# Altium PCB PCB3.PcbDoc
Units mil, origin at the board's own origin, x right, y up, seen from the top; angles counter-clockwise.
Board outline 6000 x 4000 mil, 2 copper layers (Top Layer, Bottom Layer); 15 components, 16 nets, 71 pads, 8 vias.
Unrouted connection lines stored in the file: 1.
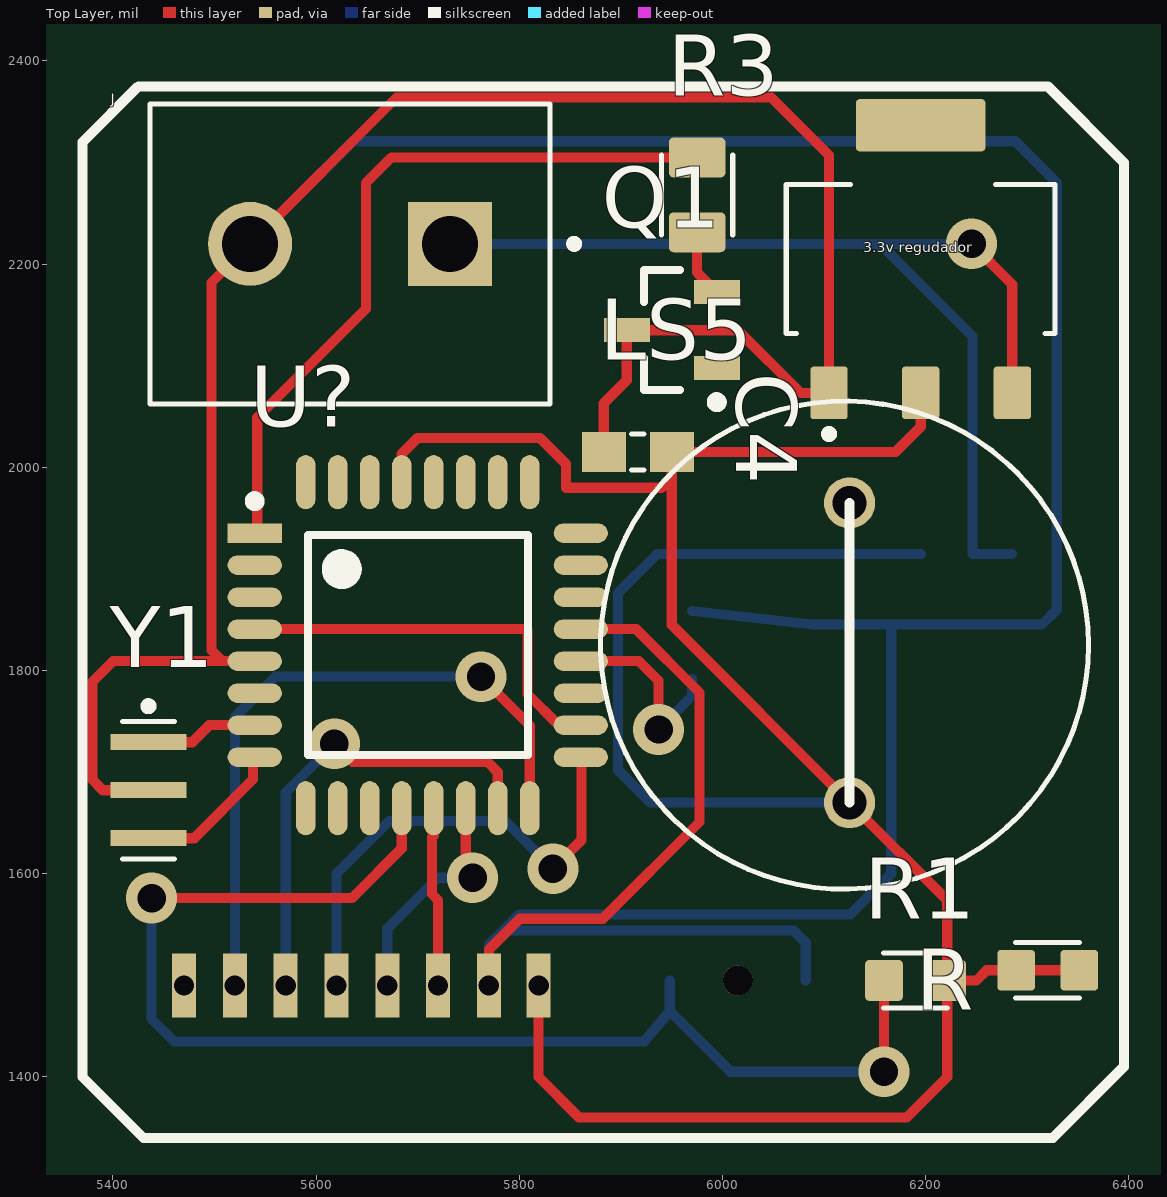
[diagram p0: Top Layer view]
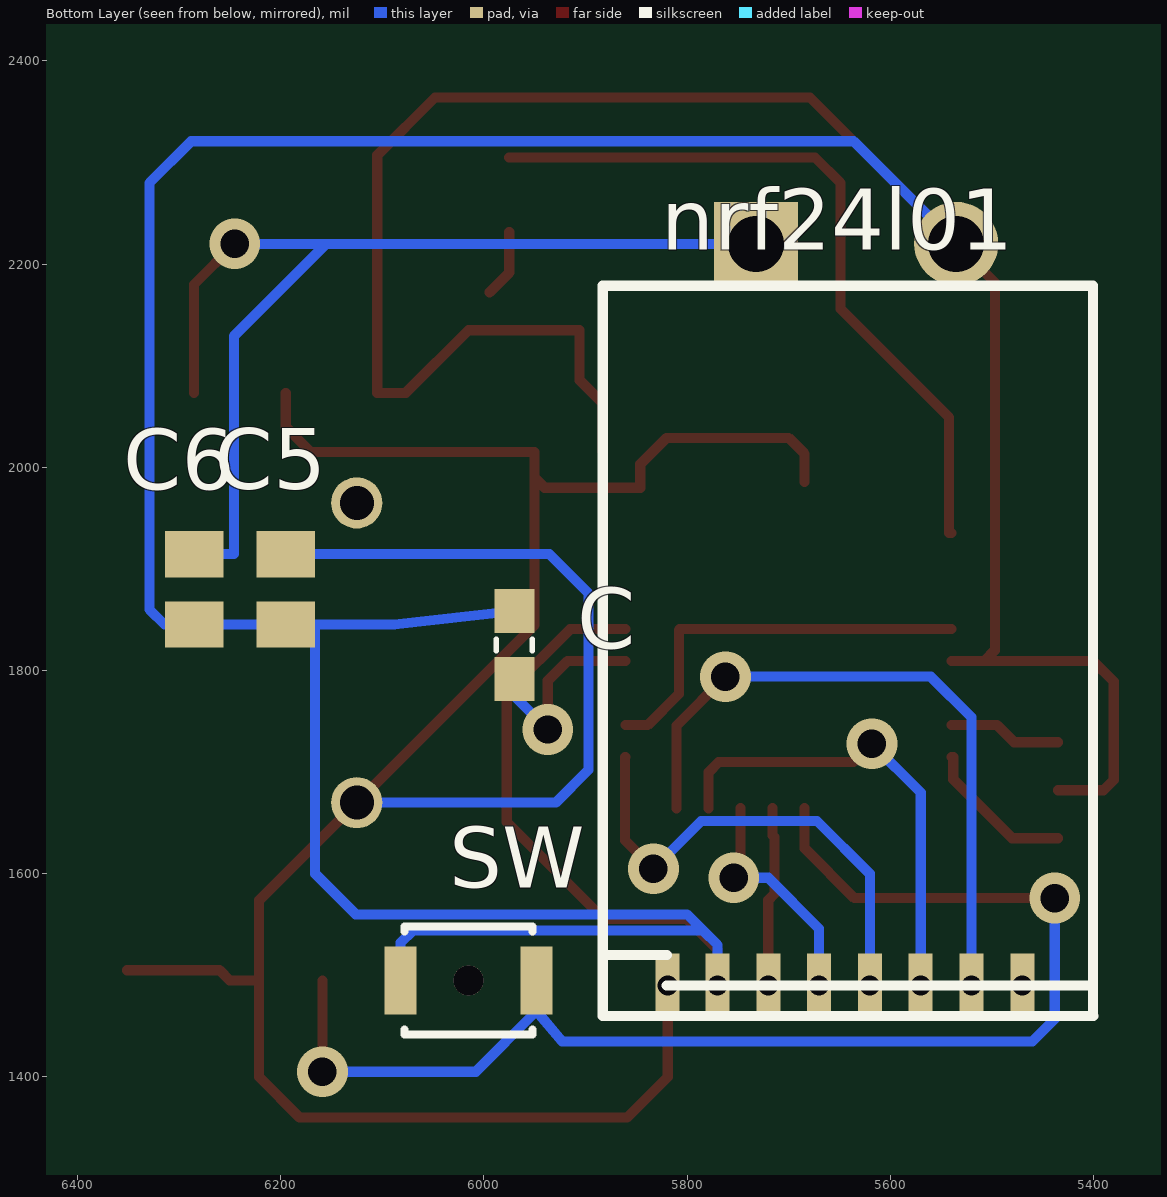
[diagram p1: Bottom Layer view, seen from below]
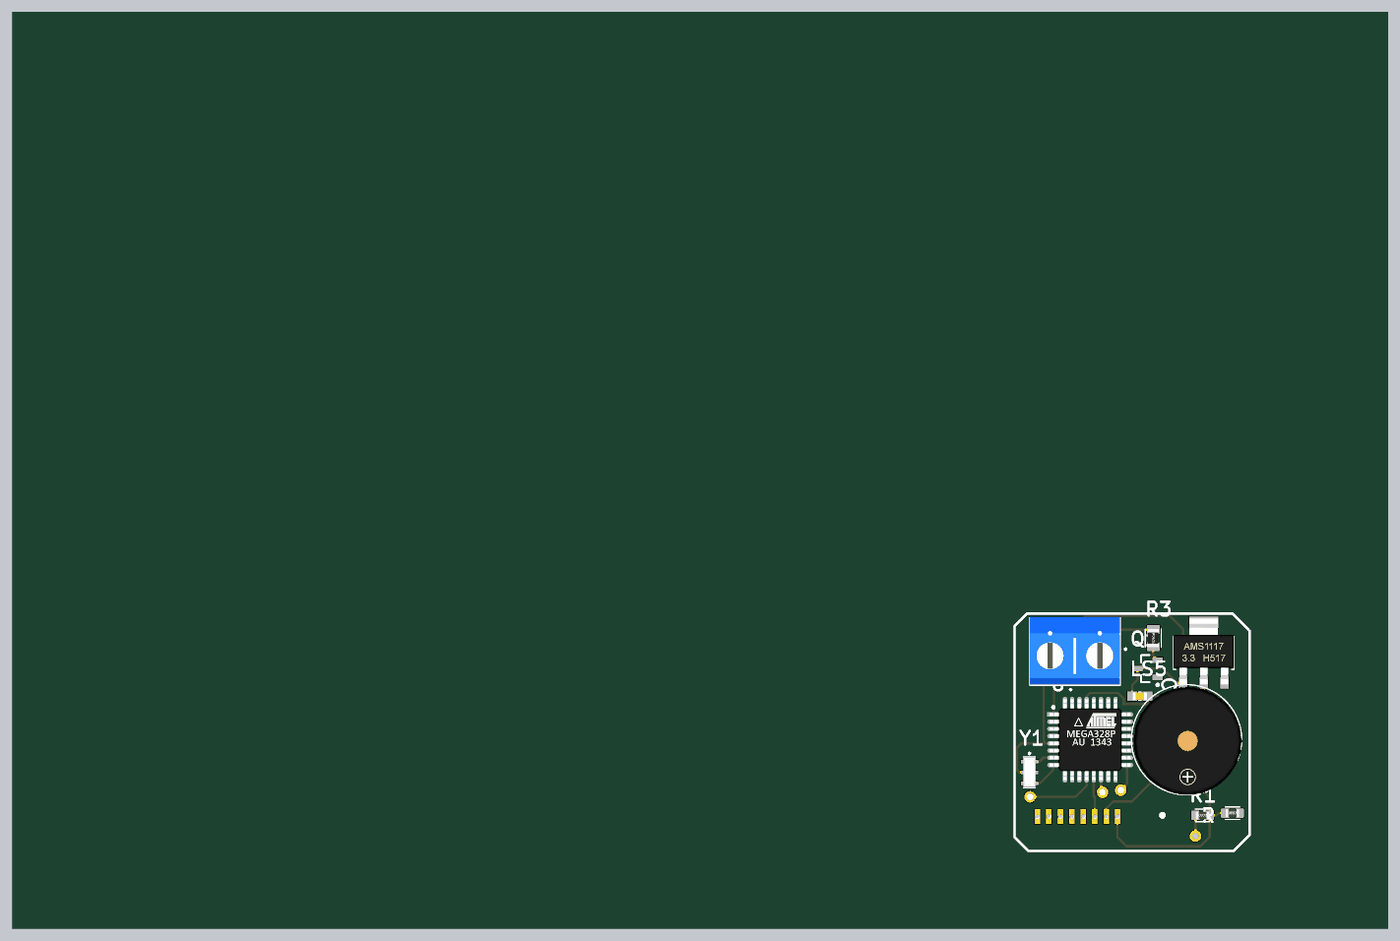
[diagram p2: 3D render of the assembled board from above, using the file's embedded part models]
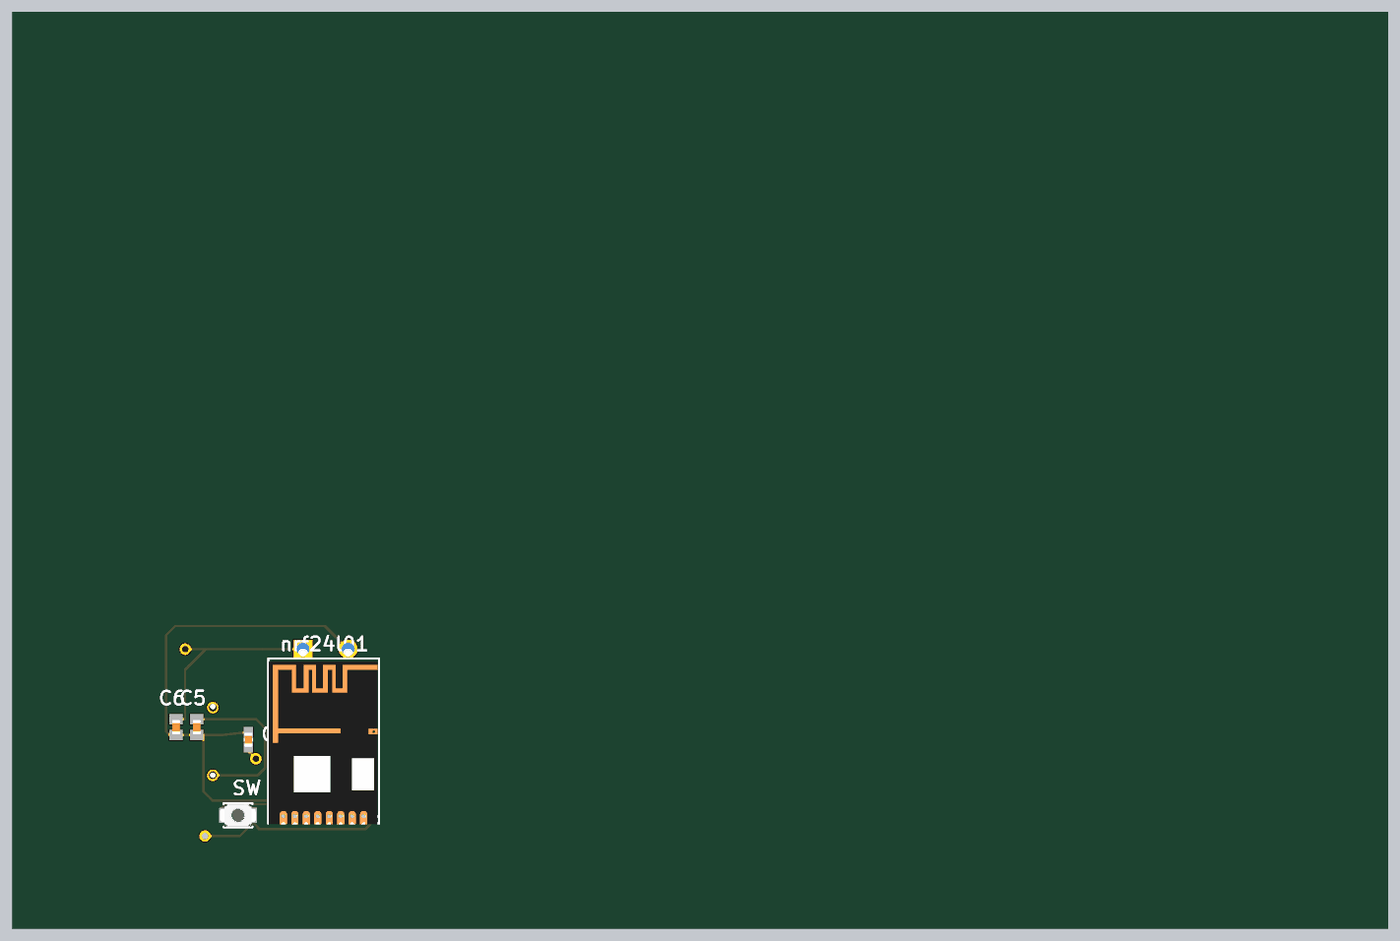
[diagram p3: 3D render of the assembled board from below, using the file's embedded part models]

## Layer stack, top to bottom
Top Solder: solder mask 0.4, Solder Resist, Dk 3.5
Top Layer: signal copper 1.4
Dielectric 1: dielectric 12.6, FR-4, Dk 4.8
Bottom Layer: signal copper 1.4
Bottom Solder: solder mask 0.4, Solder Resist, Dk 3.5

## Board outline
1000,1000 7000,1000 7000,5000 1000,5000

## Design rules (kind name [scope] priority, off if disabled: settings)
Clearance [All] p1: gap=10 ignorepadtopadclearanceinfootprint=FALSE except(0: Arc-Hole Track-Hole SMDPad-Hole THPad-Hole Via-Hole Fill-Hole Poly-Hole Region-Hole Text-Hole)
PolygonConnect [All] p1: connectstyle=Relief reliefconductorwidth=10 reliefentries=4 polygonreliefangle="90 Angle" airgapwidth=10
RoutingVias [All] p1: holewidth=28 width=50 viastyle="Through Hole" minholewidth=28 minwidth=50 maxholewidth=28 maxwidth=50
SolderMaskExpansion [All] p1: expansion=4 istentingtop=FALSE
Width [All] p1: maxlimit=10 minlimit=10 preferedwidth=10
30 further rules are at their usual default settings.

## Components (designator, comment, footprint, x,y, rotation, side; value= is the part's Value field where it differs from the comment)
"3.3v regudador" "AMS1117-3.3" SOT229P700X180-4N 6195,2205 r0 top
C "CC0603KRX7R9BB104" CAPC1608X90 5970,1825 r90 bottom
C4 "CC0603KRX7R9BB104" CAPC1608X90 5916.54,2015 r180 top
C5 "0805YC103J4T2A" CAPC2012X94N 6195,1880 r90 bottom
C6 "0805YC103J4T2A" CAPC2012X94N 6285,1880 r90 bottom
J "KF301-2P" HANDSON_KF301-2P 5633.43,2220 r180 top
LS5 "PS1240P02BT" XDCR_PS1240P02BT 6120,1825 r90 top
nrf24l01 "SMD" NRF24L01 5820,1460 r90 bottom
Q1 "QNPN" SOT-23B_N 5950,2135 r180 top
R "RP73D1J13RBTDG" RESC1608X50N 6320,1505 r0 top
R1 "RP73D1J13RBTDG" RESC1608X50N 6190,1495 r0 top
R3 "2-2176053-0" RESC2012X65N 5975,2268.19 r270 top
SW "B3U-1000P-B" Omron_0_MFG 6015,1495 r180 bottom
U? "ATMEGA328PB-AUR" Microchip_C04-074_IPC_C 5700,1825 r0 top
Y1 "clock" OSC_CSTCE8M00G52-R0 5435,1682.24 r270 top

## Footprints (in the part's own frame and the unit in brackets; to place one, negate y for a bottom-side part, rotate by r counter-clockwise, add the part's x,y. Pads: shape width x height; smd on the part's side, far side on the other; paste and mask are expansions set on the pad)
CAPC1608X90 [mm]
  rect 1.1x1 smd: 1(-0.85,0) 2(0.85,0)
  silkscreen extent -0.15,-0.45 0.15,0.45, body extent -0.8,-0.45 0.8,0.45, height 0.79
CAPC2012X94N [mm]
  rect 1.16x1.47 smd: 1(-0.88,0) 2(0.88,0)
  body extent -0.8,-0.45 0.8,0.45, height 0.79
HANDSON_KF301-2P [mm]
  rect 2.1x2.1 hole 1.4: 1(-2.5,0)
  round 2.1 hole 1.4: 2(2.5,0)
  silkscreen extent -5.7,-3.5 5,4, body extent -5,-3.56 5,3.94, height 10
Microchip_C04-074_IPC_C [mm]
  rect 1.355x0.486 smd paste+0 mask+0: 1(-4.075,2.8)
  rrect100% 1.355x0.486 smd paste+0 mask+0: 2(-4.075,2) 3(-4.075,1.2) 4(-4.075,0.4) 5(-4.075,-0.4) 6(-4.075,-1.2) 7(-4.075,-2) 8(-4.075,-2.8) 17(4.075,-2.8) 18(4.075,-2) 19(4.075,-1.2) 20(4.075,-0.4) 21(4.075,0.4) 22(4.075,1.2) 23(4.075,2) 24(4.075,2.8)
  rrect100% 0.486x1.355 smd paste+0 mask+0: 9(-2.8,-4.075) 10(-2,-4.075) 11(-1.2,-4.075) 12(-0.4,-4.075) 13(0.4,-4.075) 14(1.2,-4.075) 15(2,-4.075) 16(2.8,-4.075) 25(2.8,4.075) 26(2,4.075) 27(1.2,4.075) 28(0.4,4.075) 29(-0.4,4.075) 30(-1.2,4.075) 31(-2,4.075) 32(-2.8,4.075)
  silkscreen extent -4.2,-2.75 2.75,3.72, body extent -4.5,-4.5 4.5,4.5, height 1
NRF24L01 [mil] "smd"
  rect 62.99x23.62 hole 20: 1(30,-1) 2(30,-49.99) 3(30,-100) 4(30,-150) 5(30,-200) 6(30,-250) 7(30,-300) 8(30,-350)
  silkscreen extent 0,-420 719,63, body extent -3,-412 706,60, height 32
Omron_0_MFG [mm]
  rect 0.8x1.7 smd paste+0 mask+0: 1(-1.7,0) 2(1.7,0)
  round 0.75 hole 0.75 unplated paste-1000 mask+0: ""(0,0)
  silkscreen extent -1.6,-1.35 1.6,1.35, body extent -2,-1.25 2,1.25, height 1.75
OSC_CSTCE8M00G52-R0 [mm]
  rect 0.4x1.9 smd: 1(-1.2,0) 2(0,0) 3(1.2,0)
  silkscreen extent -2.2,-0.65 1.72,0.65, body extent -1.6,-0.65 1.6,0.65, height 0.8
RESC1608X50N [mm]
  rrect20% 0.94x1.02 smd: 1(-0.79,0) 2(0.79,0)
  silkscreen extent -0.8,-0.69 0.8,0.69, body extent -0.78,-0.43 0.78,0.43, height 0.49
RESC2012X65N [mm]
  rrect25% 1x1.42 smd: 1(-0.935,0) 2(0.935,0)
  silkscreen extent -1,-0.89 1,0.89, body extent -1,-0.62 1,0.62, height 0.6
SOT229P700X180-4N [mm]
  rrect15% 0.93x1.31 smd: 1(-2.29,-3.345) 2(0,-3.345) 3(2.29,-3.345)
  rrect15% 3.24x1.31 smd: 4(0,3.345)
  silkscreen extent -3.36,-4.47 3.36,1.86, body extent -3.35,-3.52 3.35,3.78, height 1.91
SOT-23B_N [mm] "SOT23, 3-Leads, Body 2.9x1.3mm, Pitch 0.95mm, Lead Span 2.4mm, IPC Medium Density"
  rect 1.15x0.6 smd: 1(-1.125,0.95) 2(-1.125,-0.95) 3(1.125,0)
  silkscreen extent -1.25,-1.5 0.7,1.92, body extent -0.7,-1.5 0.7,1.5, height 1.14
XDCR_PS1240P02BT [mm]
  round 1.28 hole 0.85: 1(-3.937,-0.127) 2(3.556,-0.127)
  silkscreen extent -6.1,-6.1 6.1,6.1, body extent -6.13,-6.13 5.87,5.87, height 9.6

## Part data
"3.3v regudador": "Sot223/Pkg 1-Amp 3.3-Volt Low Drop Out Voltage Regulatator", Package=None, Availability=Unavailable, MF="Advanced Monolithic Systems", MP=AMS1117-3.3, Price=None, SnapEDA_Link=https://www.snapeda.com/parts/AMS1117-3.3/Advanced%20Monolithic%20Systems/view-part/53450/?ref=snap
C C4: "0.1ÂµF Â±10% 50V Ceramic Capacitor X7R 0603 _1608 Metric_", Package="0603 Yageo", Digi-Key_Part_Number=311-1344-1-ND, Digi-Key_Purchase_URL=https://www.digikey.com/product-detail/en/yageo/CC0603KRX7R9BB104/311-1344-1-ND/2103128?utm_source=snapeda&utm_medium=aggregator&utm_campaign=symbol, MF=Yageo, MP=CC0603KRX7R9BB104, SnapEDA_Link=https://www.snapeda.com/parts/CC0603KRX7R9BB104/Yageo/view-part/78680/?ref=snap
C5 C6: "10000pF Â±5% 16V Ceramic Capacitor X7R 0805 _2012 Metric_", Package="2012 AVX", Availability=Unavailable, MF=AVX, MP=0805YC103J4T2A, Price=None, SnapEDA_Link=https://www.snapeda.com/parts/0805YC103J4T2A/AVX/view-part/606803/?ref=snap
J: "2 Pin Terminal Block 5mm Pitch", Package=Package, Availability=Unavailable, MF="Handson Technology", MP=KF301-2P, Price=None, SnapEDA_Link=https://www.snapeda.com/parts/KF301-2P/Handson%20Technology/view-part/4276957/?ref=snap
LS5: "Buzzers Transducer, Externally Driven Piezo 3V 4kHz 60dB @ 3V, 10cm Through Hole PC Pins", Package="2020 TDK", Availability=Unavailable, MF=TDK, MP=PS1240P02BT, Price=None, SnapEDA_Link=https://www.snapeda.com/parts/PS1240P02BT/TDK/view-part/53420/?ref=snap
nrf24l01: library part nrf24l01_smd, Supplier Part Number 1=311-0.0ERCT-ND, Supplier 1=Digi-Key
Q1: "NPN Bipolar Transistor", LatestRevisionDate=29-May-2009, LatestRevisionNote="IPC-7351 Footprint Added.", PackageDescription="3-Pin SOT-23 Package 0.95 mm Pitch, 2.4 mm Lead Span", PackageReference=SOT-23B, PackageVersion=Aug-1999, Published=8-Jun-2000, Publisher="Altium Limited"
R R1: "Res, Thin Film, 13r, 0.1%, 0.1w, 0603", Package="0603 TE Connectivity / AMP", Availability=Unavailable, MF="TE Connectivity", MP=RP73D1J13RBTDG, Price=None, SnapEDA_Link=https://www.snapeda.com/parts/RP73D1J13RBTDG/TE%20Connectivity/view-part/970906/?ref=snap, TE_purchase_URL=https://www.te.com/usa-en/product-RP73D1J13RBTDG.html?te_bu=Cor&te_type=disp&te_campaign=seda_glo_cor-seda-global-disp-prtnr-fy19-seda-model-bom-cta_sma-317_1&elqCampaignId=32493
R3: "RES 0.33 OHM 1% 1/4W 0805", Package=0805, Power_Rating=".25 W", Resistance=.33, Tolerance=1%, Availability=Unavailable, EU_RoHS_Compliance="Compliant with Exemptions", MF="TE Connectivity", MP=2-2176053-0, Price=None, SnapEDA_Link=https://www.snapeda.com/parts/2-2176053-0/TE%20Connectivity/view-part/2214508/?ref=snap
Y1: library part CSTCE8M00G52-R0, "8MHz Ceramic Resonator Built in Capacitor 10pF Â±0.2% -20Â°C ~ 80Â°C Surface Mount", Package="Surface Mount Murata Electronics North America", Availability=Bad, Check_prices=https://www.snapeda.com/parts/CSTCE8M00G52-R0/Murata%20Electronics%20North%20America/view-part/234504/?ref=eda, MF=Murata, MP=CSTCE8M00G52-R0, Price=None, SnapEDA_Link=https://www.snapeda.com/parts/CSTCE8M00G52-R0/Murata%20Electronics%20North%20America/view-part/234504/?ref=snap

## Via types
v1: diameter 50, hole 28, Top Layer to Bottom Layer, 8 vias

## Nets (pads, with @x,y where several pads share a name; then routed paths per layer and width w, separated by ;. In a path a pad name is that pad's centre, name@x,y a point inside that pad or via, vN(x,y) a via of type N, cw(c..) or ccw(c..) an arc to the next point about the centre after c; other vN are vias at no path point)
3v3: "3.3v regudador.2" C4.1 C5.2 LS5.1 nrf24l01.1 R1.2 R.1 R.2 U?.29 | length 2742.5
  Top Layer w10: U?.29 5684.25,2013.25 5700,2029 5820,2029 5846,2003 5846,1980 5940,1980 5950,1990 ; nrf24l01.1 5819,1400 5859,1360 6181.1,1360 6221.1,1400 R1.2 ; 6195,2073.31 6195,2040 6170,2015 C4.1 5950,1990 ; R.2 R.1 6260,1505 6250,1495 R1.2 ; 5950,1990 5950,1845 LS5.1 6221.1,1573.9 R1.2
  Bottom Layer w10: LS5.1 5929.22,1670 5897,1702.22 5897,1876 5935.65,1914.65 C5.2
GND: "3.3v regudador.1" C4.2 C5.1 C6.1 C.2 J.2 nrf24l01.2 Q1.3 SW.1 U?.5 U?.21 Y1.2 | length 5249.6
  Top Layer w10: Y1.2 5390,1682.24 5380,1692.24 5380,1789.25 5400,1809.25 5507.75,1809.25 ; U?.5 5507.75,1809.25 ; nrf24l01.2 5770.01,1525.29 5800.4,1555.68 5882.11,1555.68 5977.34,1650.92 5977.34,1778.41 5915,1840.75 U?.21 ; C4.2 5883.07,2063 5905.71,2085.64 Q1.3 6015,2135 6076.69,2073.31 6104.84,2073.31 6104.84,2307.16 6048,2364 5679,2364 J.2 5497,2182 5497,1820 5507.75,1809.25
  Bottom Layer w10: J.2 5636,2321 6288,2321 6329,2280 6329,1860 6314.35,1845.35 C6.1 C5.1 6166,1845.35 ; nrf24l01.2 5770.01,1530 5784.01,1544 ; C.2 6088.11,1845.35 6166,1845.35 ; SW.1 6081.93,1532.07 6070,1544 5784.01,1544 ; 5784.01,1544 5800.01,1560 6126,1560 6166,1600 6166,1845.35
"Net3.3v regudador_3": "3.3v regudador.3" C6.2 J.1 | length 1058.6
  Top Layer w10: v1(6245.16,2220) 6285.16,2180 6285.16,2073.31
  Bottom Layer w10: J.1 6155,2220 ; v1(6245.16,2220) 6155,2220 ; C6.2 6246,1914.65 6246,2129 6155,2220
NetC_1: C.1 U?.20 | length 195.7
  Top Layer w10: U?.20 5917.75,1809.25 5937,1790 v1(5937,1742)
  Bottom Layer w10: v1(5937,1742) 5970,1775 C.1
NetLS5_2: LS5.2 Q1.1
Netnrf24l01_3: nrf24l01.3 U?.13 | length 177.8
  Top Layer w10: U?.13 5715.75,1637.75 5714,1636 5714,1580 5720,1574 nrf24l01.3
Netnrf24l01_4: nrf24l01.4 U?.14 | length 232.1
  Top Layer w10: U?.14 5747.24,1602.76 v1(5754,1596)
  Bottom Layer w10: nrf24l01.4 5670,1546 5720,1596 v1(5754,1596)
Netnrf24l01_5: nrf24l01.5 U?.17 | length 485.9
  Top Layer w10: v1(5833,1605) 5861,1633 5861,1714.76 U?.17
  Bottom Layer w10: nrf24l01.5 5620,1600 5672,1652 5786,1652 v1(5833,1605)
Netnrf24l01_6: nrf24l01.6 U?.15 | length 465.7
  Top Layer w10: v1(5618,1728) 5636,1710 5768.74,1710 5778.74,1700 U?.15
  Bottom Layer w10: nrf24l01.6 5570,1680 v1(5618,1728)
Netnrf24l01_7: nrf24l01.7 U?.16 | length 672.1
  Top Layer w10: v1(5762.24,1794) 5810.24,1746 U?.16
  Bottom Layer w10: nrf24l01.7 5520,1754 5560,1794 v1(5762.24,1794)
NetQ1_2: Q1.2 R3.2 | length 67
  Top Layer w10: R3.2 5975,2191.69 Q1.2
NetR1_1: R1.1 SW.2 U?.12 | length 1313.9
  Top Layer w10: v1(5438,1576) 5635.25,1576 5684.25,1625 U?.12 ; v1(6158.9,1405.07) R1.1
  Bottom Layer w10: v1(5438,1576) 5438,1457 5460,1435 5923.07,1435 SW.2@5948.07,1465 ; SW.2 SW.2@5948.07,1465 ; v1(6158.9,1405.07) 6008,1405.07 SW.2@5948.07,1465
NetR3_1: R3.1 U?.1 | length 727.9
  Top Layer w10: U?.1 5542,1935.24 5542,2049 5649,2156 5649,2280 5674,2305 R3.1
NetU?_4: U?.4 U?.18 | length 396.9
  Top Layer w10: U?.4 5807.25,1840.75 5808,1840 5808,1777 5838.74,1746.26 U?.18
NetU?_7: U?.7 Y1.1 | length 111.5
  Top Layer w10: Y1.1 5478,1729.49 5494.77,1746.26 U?.7
NetU?_8: U?.8 Y1.3 | length 150.4
  Top Layer w10: Y1.3 5480,1635 5537.87,1692.87 5537.87,1714.76 U?.8
pads on no net: "3.3v regudador.4" nrf24l01.8 SW. U?.2 U?.3 U?.6 U?.9 U?.10 U?.11 U?.19 U?.22 U?.23 U?.24 U?.25 U?.26 U?.27 U?.28 U?.30 U?.31 U?.32

## Silkscreen, mask and mechanical layers (free items; w line width, h text height)
Top Overlay:
  lines w10: 5370,1400 5370,2320 5425,2375 6320,2375 6395,2300 6395,1410 6325,1340 5430,1340 5370,1400